# Altium PCB PCB_Layout.PcbDoc (part 2 of 2)
Units mil, origin at the board's own origin, x right, y up, seen from the top; angles counter-clockwise.
Board outline 6000 x 4000 mil, 2 copper layers (Top Layer, Bottom Layer); 69 components, 66 nets, 256 pads, 9 vias.
Unrouted connection lines stored in the file: 15.
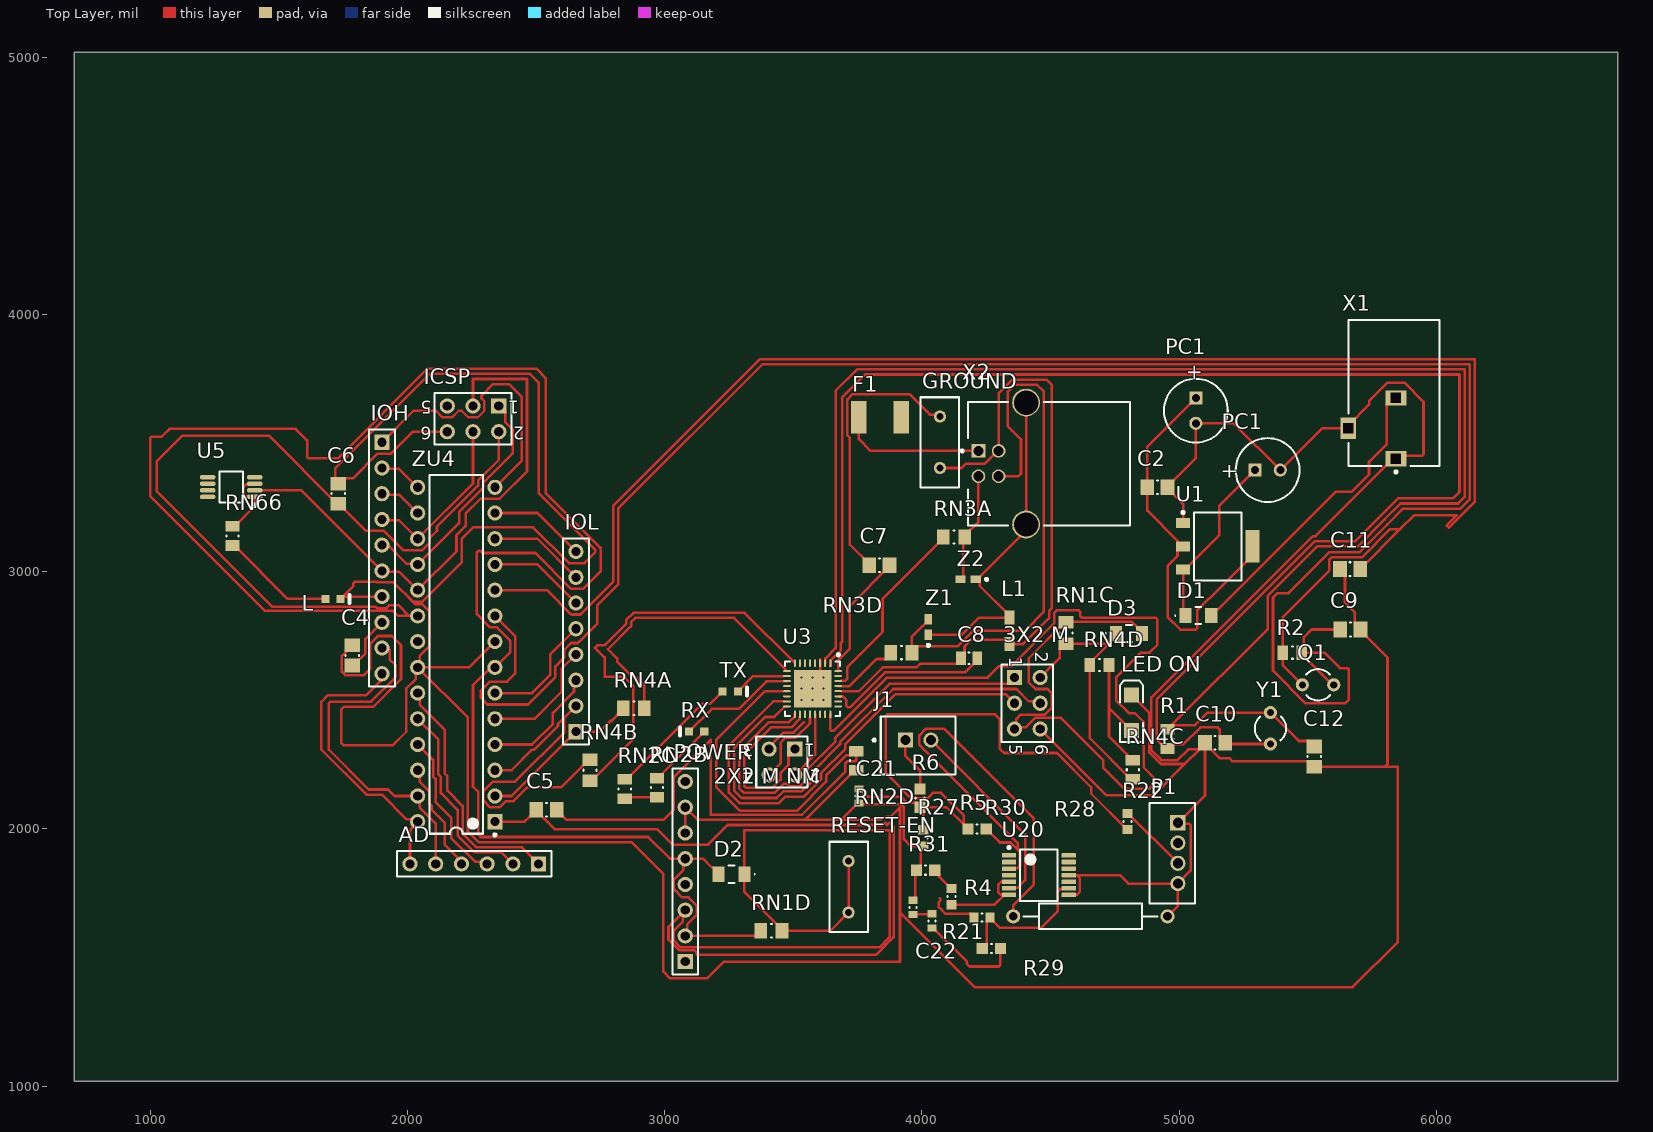
[diagram p0: Top Layer view]

## Via types
v1: diameter 19.68, hole 7.87, Top Layer to Bottom Layer, 9 vias

## Nets (pads, with @x,y where several pads share a name; then routed paths per layer and width w, separated by ;. In a path a pad name is that pad's centre, name@x,y a point inside that pad or via, vN(x,y) a via of type N, cw(c..) or ccw(c..) an arc to the next point about the centre after c; other vN are vias at no path point) (continued)
NetRN66_2: RN66.2 U5.1 U5.3 | length 277.9
  Top Layer w10: RN66.2 1326.89,3176.38 1406.54,3256.02 U5.1 1405.06,3292.07 1375.26,3292.07 1361.02,3306.3 1361.02,3326.06 1375.26,3340.3 1405.06,3340.3 U5.3
NetRX_2: RX.2 U3.11 | length 462
  Top Layer w10: RX.2 3183.9,2466.85 3288.9,2466.85 3395.83,2573.78 3474.84,2573.78 U3.11
NetTX_2: TX.2 U3.10 | length 201.5
  Top Layer w10: TX.2 3343.9,2593.78 U3.10@3461.45,2593.78
VCC: "3X2 M.2" C2.2 C6.1 C7.2 D2.1 D3.2 ICSP.2 P1.3 PC1.1@5065,3675 POWER.2 POWER.5 R22.2 RN1C.1 RN1D.1 RN2B.2 RN2C.2 RN4C.1 RN4D.1 U1.2 U1.4 U3.4 U3.32 ZU4.7 ZU4.20 | length 14252.6
  Top Layer w10: ZU4.20 2007.05,2827.95 ; ICSP.2 2355,3434.21 2275,3354.21 2275,3334.67 2115,3174.67 2115,3158.98 2086.72,3130.7 2086.72,3111.7 2058.44,3083.43 1983.36,3083.43 1908.36,3158.43 1839.72,3158.43 1734.57,3263.58 C6.1 1726.69,3263.58 1461.3,3528.98 1125,3528.98 1025,3428.98 1025,3313.98 1475.75,2863.23 1877.61,2863.23 1882.41,2858.43 1919.3,2858.43 1930.88,2870 1965,2870 2007.05,2827.95 ; RN2C.2 2850,2122.6 RN2B.2 ; D2.1 3209.61,1829.88 3190.98,1848.5 3185.08,1848.5 3149.61,1883.98 POWER.5 ; RN1D.1 3373.66,1603.58 3354.06,1583.98 POWER.2 3087.5,1591.48 3087.5,1628.5 3124.53,1665.53 3124.53,1702.42 3092.97,1733.98 3067.03,1733.98 3035.47,1765.53 3035.47,1802.42 3072.5,1839.45 3072.5,1876.48 POWER.5 ; U3.32 3674.41,2655.34 3720,2700.93 3720,2866.69 3874.37,3021.06 C7.2 ; 4460,2588.31 4535.47,2663.78 4535.47,2700.67 4555.08,2720.28 RN1C.1 4715.08,2720.28 4730.28,2735.47 D3.2@4736.18,2735.47 ; D3.2 4754.8,2754.09 D3.2@4736.18,2735.47 ; R22.2 4801.97,2060 4995,1866.97 P1.3 ; RN4C.1 4813.11,2192.4 4652.6,2352.91 RN4D.1 4652.6,2644.49 4736.18,2728.07 D3.2@4736.18,2735.47 ; U1.2 U1.2@5008.43,3098.28 ; PC1.1@5065,3675 4876.26,3486.26 C2.2 4876.26,3237.34 4993.74,3119.86 4993.74,3112.97 U1.2@5008.43,3098.28 ; U1.4 5285,3061.87 5167.39,2944.26 5166.04,2944.26 5070,2848.22 5070,2780 5064.14,2774.14 5005.35,2774.14 4955,2824.5 4955,3022.43 4993.74,3061.17 4993.74,3083.6 U1.2@5008.43,3098.28 ; 2007.05,2827.95 1964.33,2827.95 1944.81,2847.48 1446.08,2847.48 1000,3293.56 1000,3519.14 1005.86,3525 1045,3525 1075,3555 1565,3555 1610,3510 1610,3445.86 1615.86,3440 1729.35,3440 2078.33,3788.98 2501.02,3788.98 2537.67,3752.33 2537.67,3305.62 2750.86,3092.43 2750.86,3000.86 2683.43,2933.43 2636.56,2933.43 2497.5,3072.48 2292.52,3072.48 2284.14,3080.86 2275.86,3080.86 2270,3075 2270,2834.98 2321.56,2783.43 2347.5,2783.43 2400,2730.92 2400,2687.95 ZU4.7 2332.5,2620.45 2316.48,2620.45 2255,2558.98 2255,2163.78 2275.47,2143.31 2275.47,1978.36 2285.32,1968.5 2935.47,1968.5 3020,1883.98 POWER.5
pads on no net: ICSP.5 P1.2 POWER.1 U3.5 U3.6 U3.7 U3.12 U3.14 U3.22 U3.23 U3.25 U3.26 U3.31 U5.4 U5.5 U5.6 U5.7 U5.8 U20.4 U20.12 U20.13 U20.14 ZU4.21

## Text inside footprints (layer, text, board x,y; h text height)
"2X2 M NM": Top Overlay "1" at 3586.1,2330 h50 r180; Top Overlay "2" at 3606.1,2230 h50 r180; Top Overlay "4" at 3346.1,2230 h50 r180; Top Overlay "3" at 3346.1,2330 h50 r180
"3X2 M": Top Overlay "6" at 4440,2328.31 h50 r270; Top Overlay "5" at 4340,2328.31 h50 r270; Top Overlay "2" at 4440,2688.31 h50 r270; Top Overlay "1" at 4340,2668.31 h50 r270
ICSP: Top Overlay "6" at 2095,3563.98 h50 r180; Top Overlay "5" at 2095,3663.98 h50 r180; Top Overlay "2" at 2455,3563.98 h50 r180; Top Overlay "1" at 2435,3663.98 h50 r180
L1: Mechanical 6 "Land Pattern Adapted for 35/70um Land Pad Thickness" at 4303.58,2677.48 h3.94 r90
PC1: Top Overlay "+" at 5161.14,3365.47 h59.06
PC1: Top Overlay "+" at 5035.47,3808.86 h59.06 r270